# Altium PCB ife19_Elec_TS_TSAL_Light.PcbDoc
Units mil, origin at the board's own origin, x right, y up, seen from the top; angles counter-clockwise.
Board outline 1385.15 x 1390 mil, 2 copper layers (Top Layer, Bottom Layer); 25 components, 21 nets, 49 pads, 5 vias.
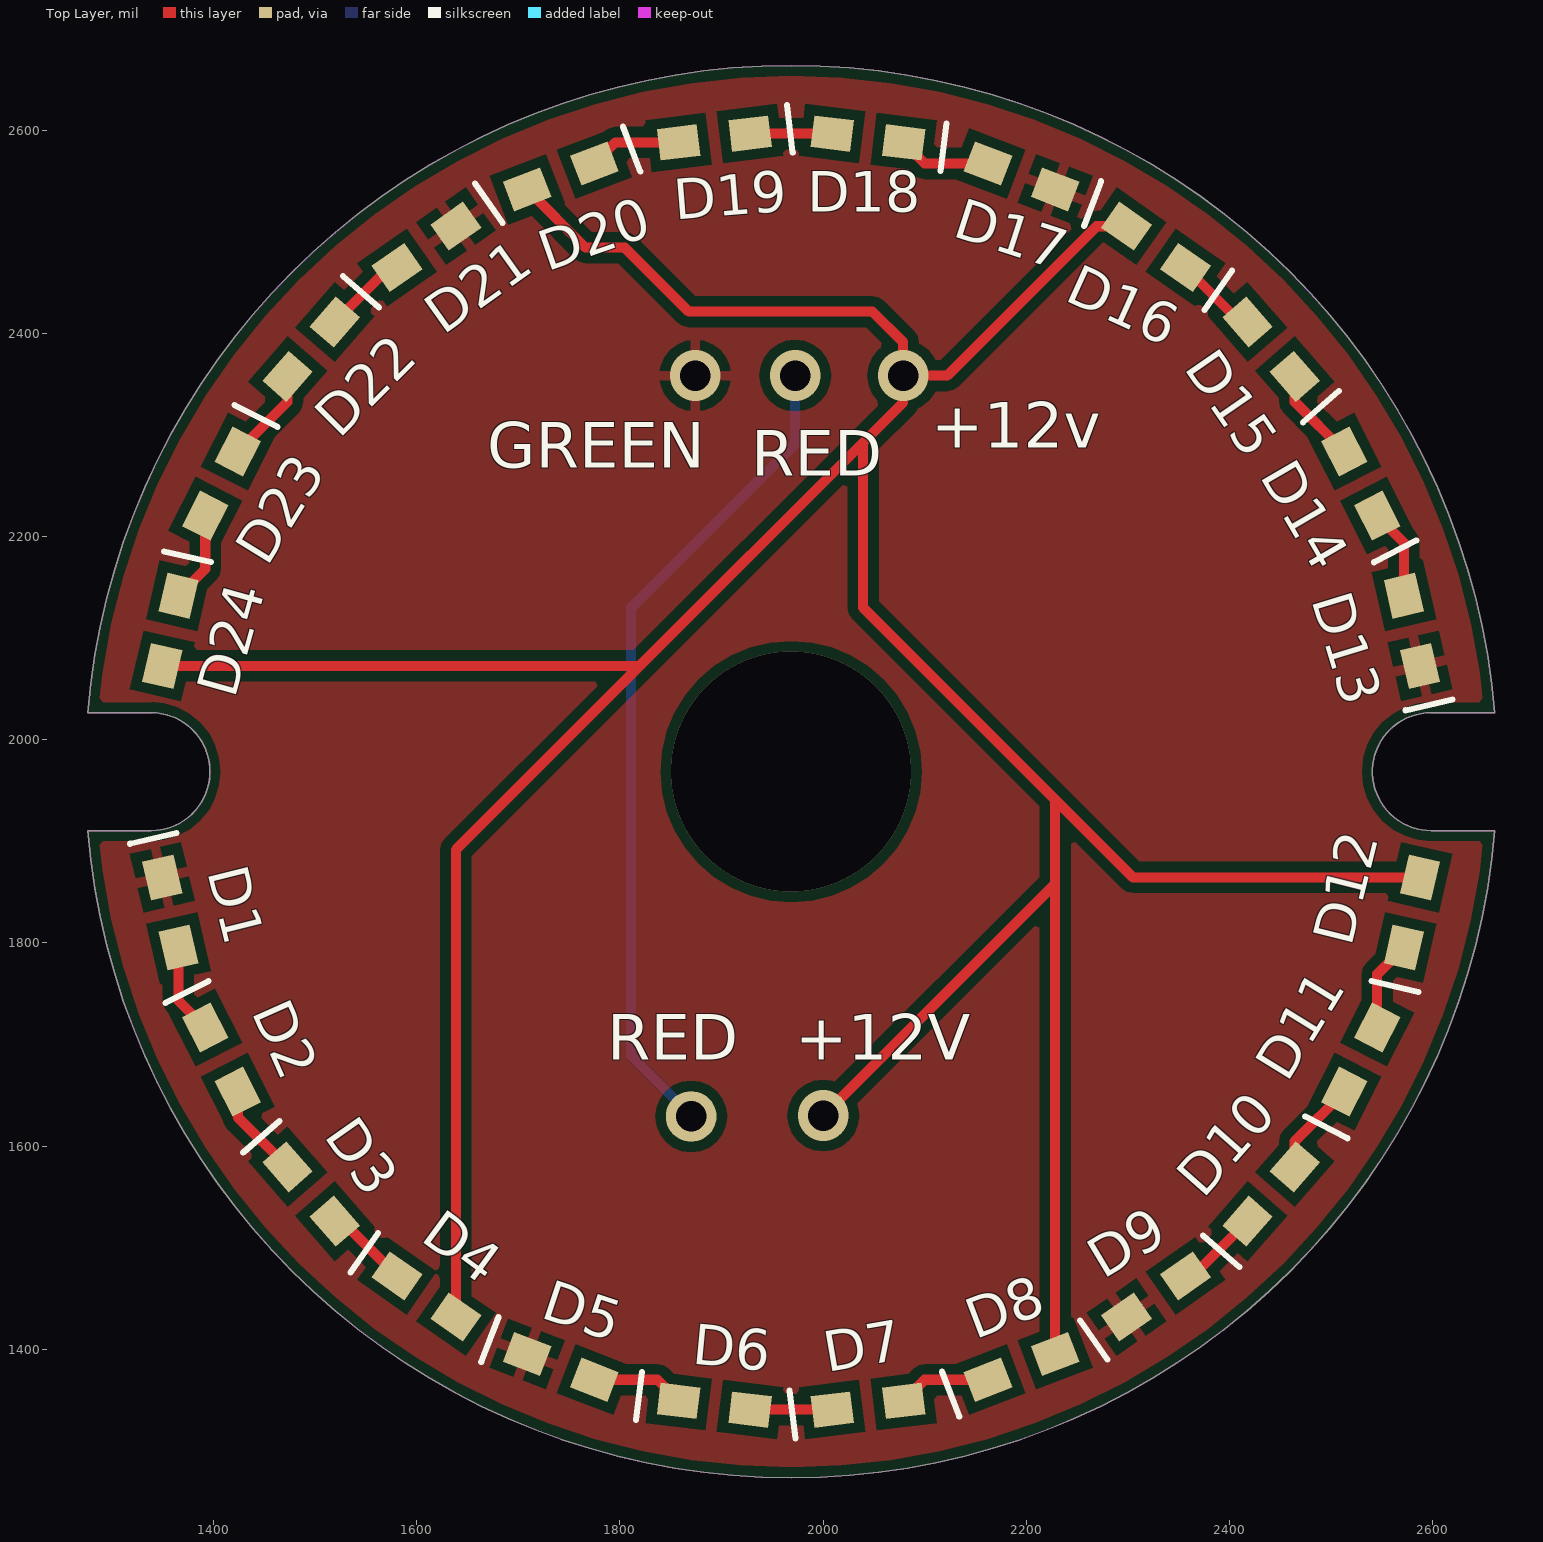
[diagram p0: Top Layer view]
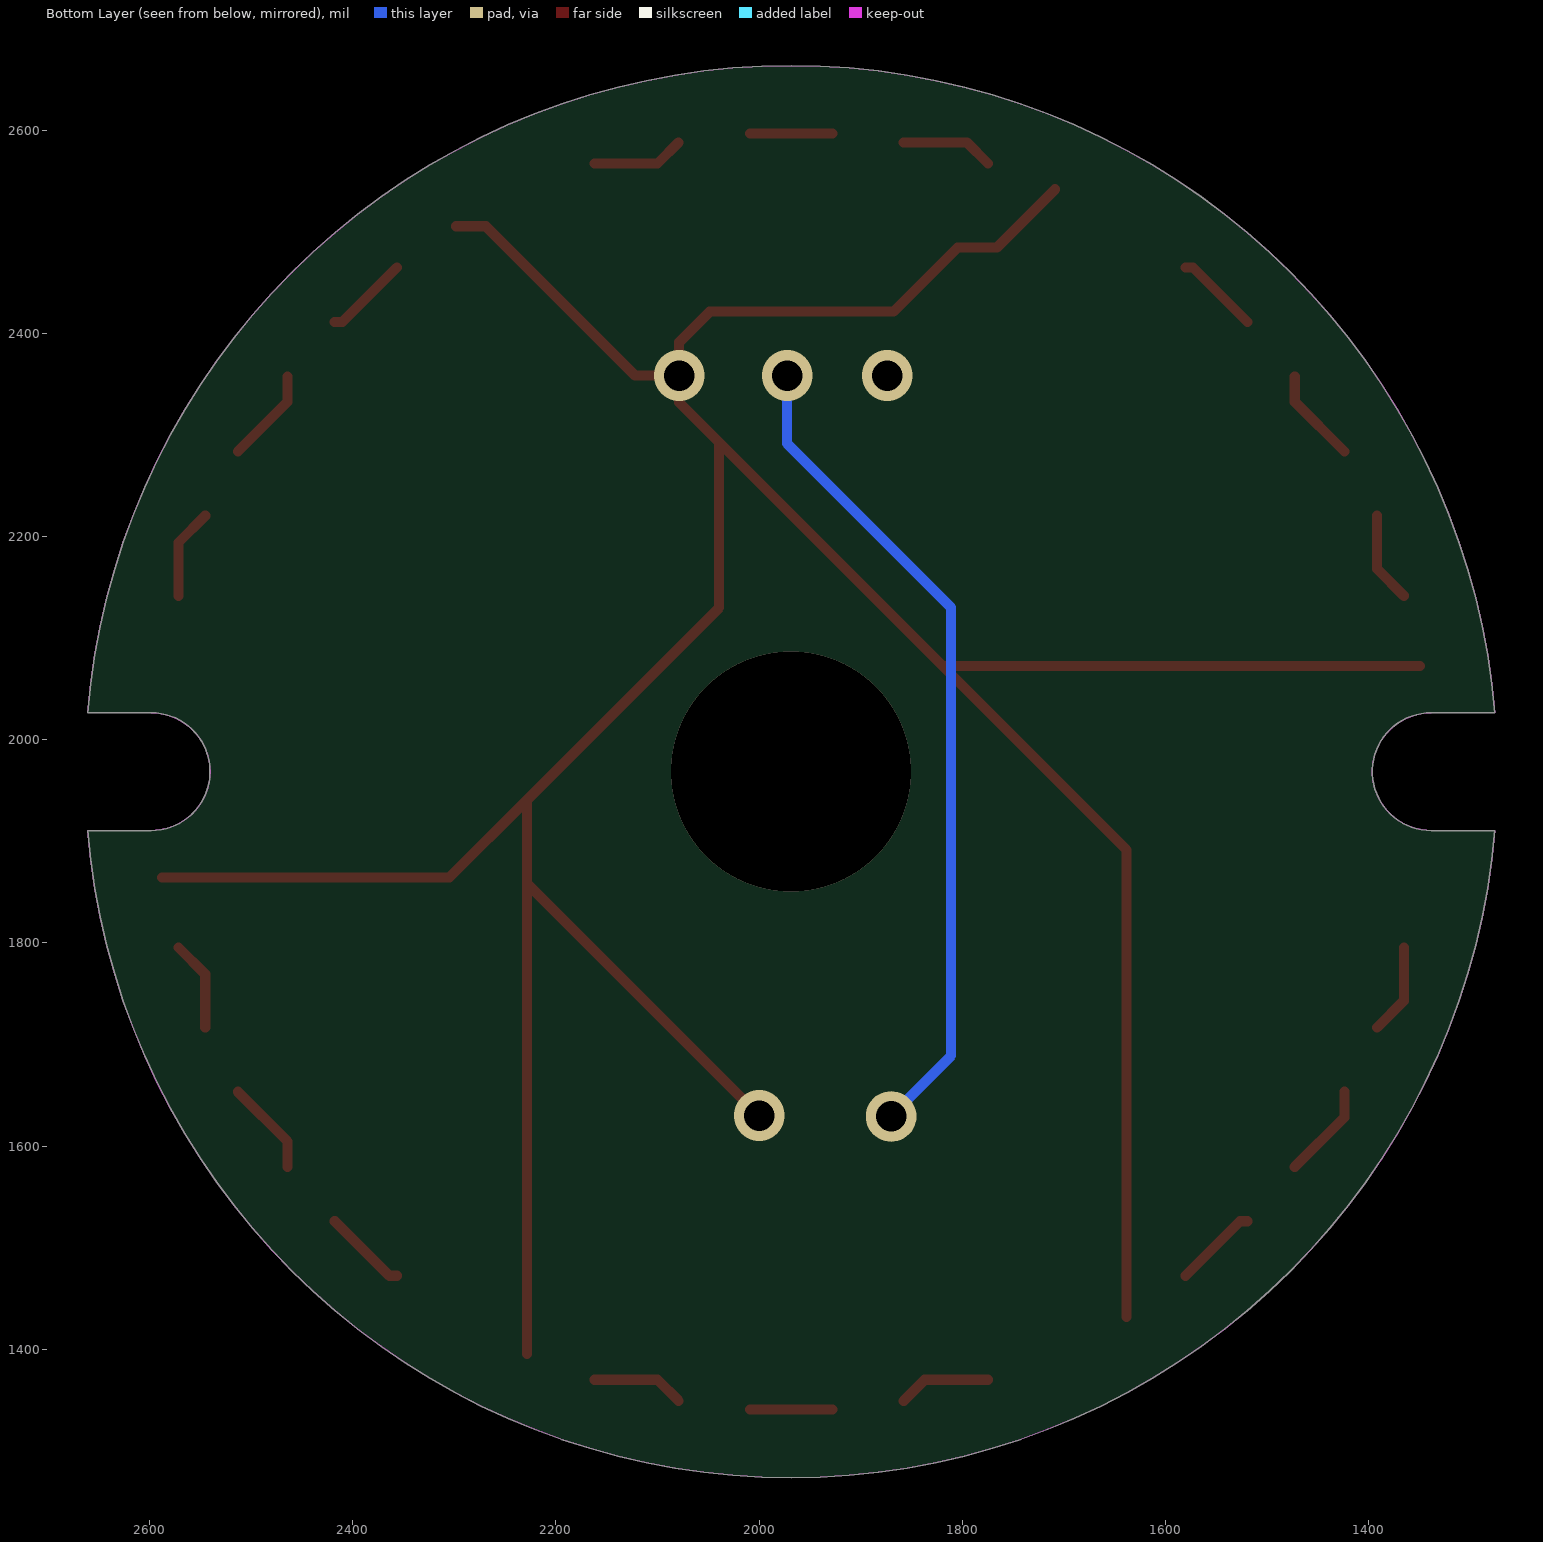
[diagram p1: Bottom Layer view, seen from below]
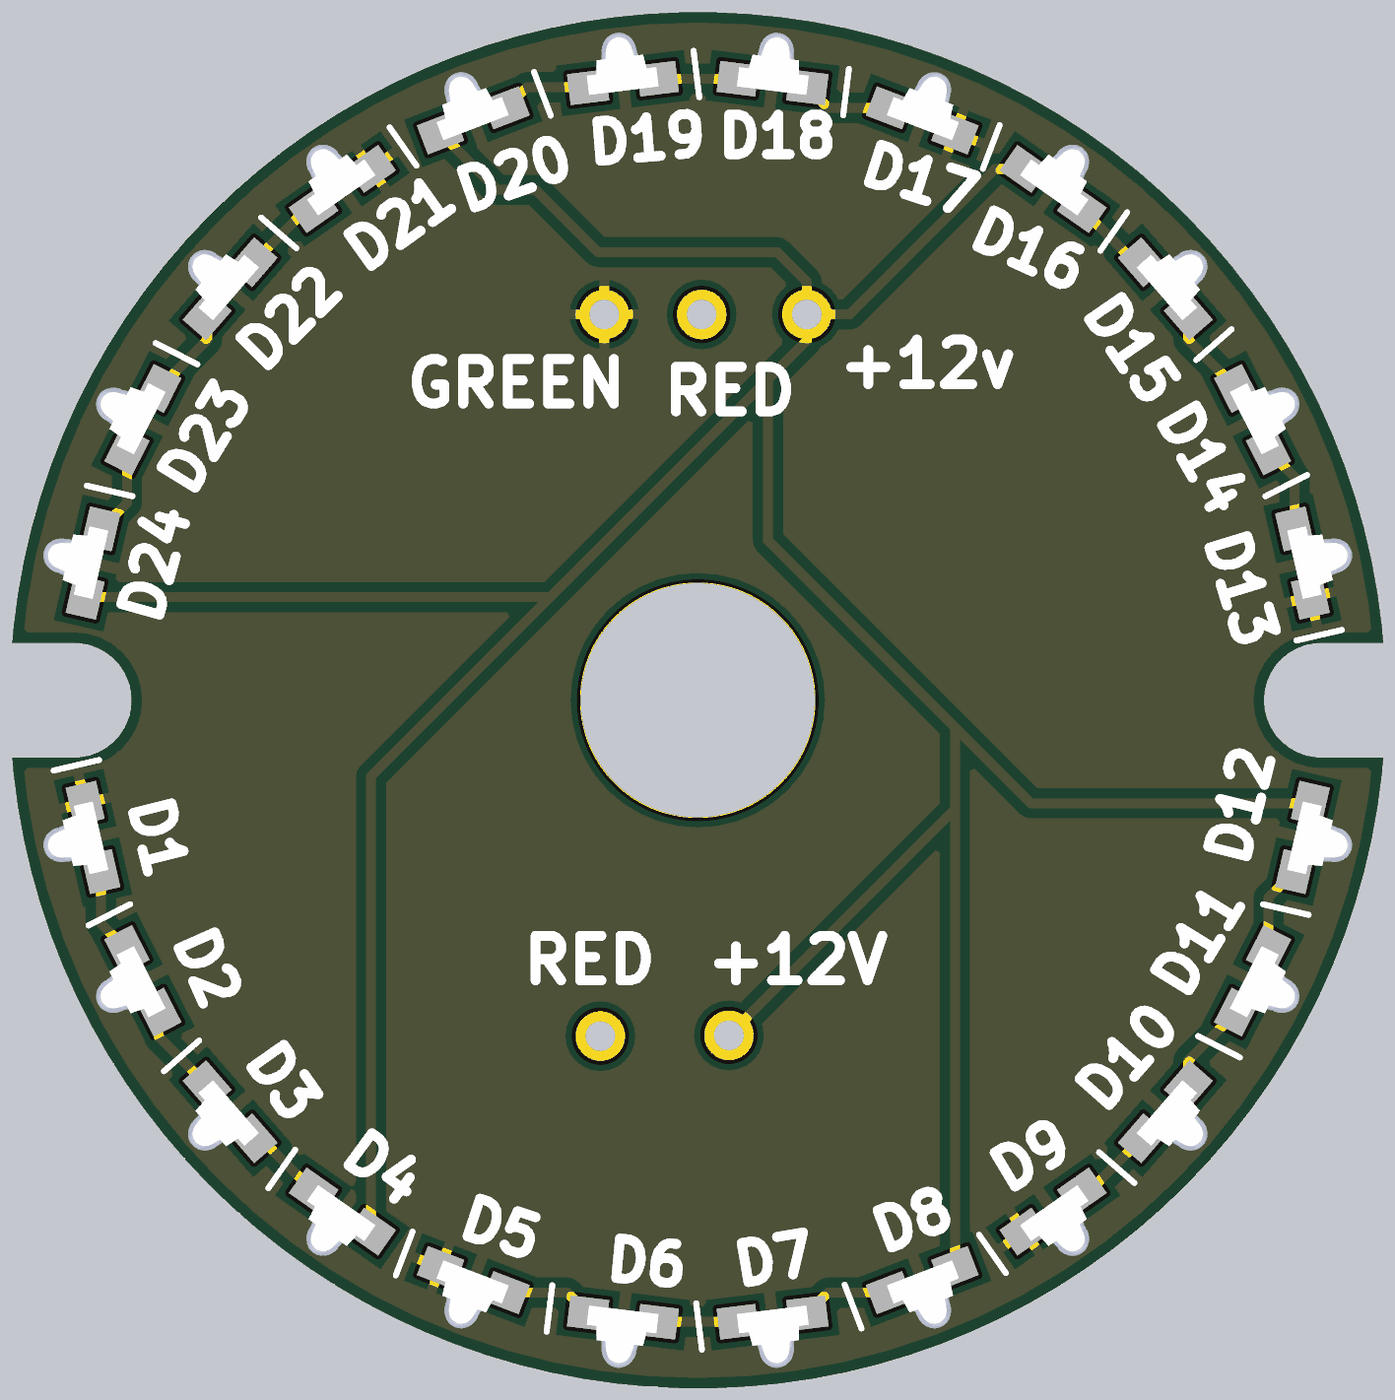
[diagram p2: 3D render of the assembled board from above, using the file's embedded part models]

## Layer stack, top to bottom
Top Solder: solder mask 0.4, Solder Resist, Dk 3.5
Top Layer: signal copper 1.4
Dielectric 1: dielectric 12.6, FR-4, Dk 4.8
Bottom Layer: signal copper 1.4
Bottom Solder: solder mask 0.4, Solder Resist, Dk 3.5

## Board outline
1275.93,1910.5 1338.5,1910.5 ccw(c1338.5,1968.5) 1338.5,2026.5 1275.93,2026.5 cw(c1968.5,1968.5) 2661.08,2026.5 2598.5,2026.5 ccw(c2598.5,1968.5) 2598.5,1910.5 2661.08,1910.5 cw(c1968.5,1968.5)

## Design rules (kind name [scope] priority, off if disabled: settings)
Clearance [All] p1: gap=10 ignorepadtopadclearanceinfootprint=FALSE except(0: Arc-Hole Track-Hole SMDPad-Hole THPad-Hole Via-Hole Fill-Hole Poly-Hole Region-Hole Text-Hole)
PolygonConnect [All] p1: connectstyle=Relief reliefconductorwidth=10 reliefentries=4 polygonreliefangle="90 Angle" airgapwidth=10
RoutingVias [All] p1: holewidth=28 width=50 viastyle="Through Hole" minholewidth=28 minwidth=50 maxholewidth=28 maxwidth=50
SolderMaskExpansion [All] p1: expansion=4
Width [All] p1: maxlimit=118.11 minlimit=6 preferedwidth=10
30 further rules are at their usual default settings.

## Components (designator, comment, footprint, x,y, rotation, side; value= is the part's Value field where it differs from the comment)
D1 "LEDGREEN-1806-RIGHT" LEDGREEN-1806-RIGHT 1357.48,1829.92 r283 top
D2 "LEDGREEN-1806-RIGHT" LEDGREEN-1806-RIGHT 1407.87,1685.04 r297 top
D3 "LEDGREEN-1806-RIGHT" LEDGREEN-1806-RIGHT 1496.06,1552.76 r311 top
D4 "LEDGREEN-1806-RIGHT" LEDGREEN-1806-RIGHT 1609.45,1451.97 r325 top
D5 "LEDGREEN-1806-RIGHT" LEDGREEN-1806-RIGHT 1741.73,1382.68 r339 top
D6 "LEDGREEN-1806-RIGHT" LEDGREEN-1806-RIGHT 1892.91,1344.88 r353 top
D7 "LEDGREEN-1806-RIGHT" LEDGREEN-1806-RIGHT 2044.09,1344.88 r7 top
D8 "LEDGREEN-1806-RIGHT" LEDGREEN-1806-RIGHT 2195.28,1382.68 r21 top
D9 "LEDGREEN-1806-RIGHT" LEDGREEN-1806-RIGHT 2327.56,1451.97 r35 top
D10 "LEDGREEN-1806-RIGHT" LEDGREEN-1806-RIGHT 2440.94,1552.76 r49 top
D11 "LEDGREEN-1806-RIGHT" LEDGREEN-1806-RIGHT 2529.13,1685.04 r63 top
D12 "LEDGREEN-1806-RIGHT" LEDGREEN-1806-RIGHT 2579.53,1829.92 r77 top
D13 "LEDGREEN-1806-RIGHT" LEDGREEN-1806-RIGHT 2579.53,2107.09 r103 top
D14 "LEDGREEN-1806-RIGHT" LEDGREEN-1806-RIGHT 2529.13,2251.97 r117 top
D15 "LEDGREEN-1806-RIGHT" LEDGREEN-1806-RIGHT 2440.94,2384.25 r131 top
D16 "LEDGREEN-1806-RIGHT" LEDGREEN-1806-RIGHT 2327.56,2485.04 r145 top
D17 "LEDGREEN-1806-RIGHT" LEDGREEN-1806-RIGHT 2195.28,2554.33 r159 top
D18 "LEDGREEN-1806-RIGHT" LEDGREEN-1806-RIGHT 2044.09,2592.13 r173 top
D19 "LEDGREEN-1806-RIGHT" LEDGREEN-1806-RIGHT 1892.91,2592.13 r187 top
D20 "LEDGREEN-1806-RIGHT" LEDGREEN-1806-RIGHT 1741.73,2554.33 r201 top
D21 "LEDGREEN-1806-RIGHT" LEDGREEN-1806-RIGHT 1609.45,2485.04 r215 top
D22 "LEDGREEN-1806-RIGHT" LEDGREEN-1806-RIGHT 1496.06,2384.25 r229 top
D23 "LEDGREEN-1806-RIGHT" LEDGREEN-1806-RIGHT 1407.87,2251.97 r243 top
D24 "LEDGREEN-1806-RIGHT" LEDGREEN-1806-RIGHT 1357.48,2107.09 r257 top
RED "TP*" Testpoint 1870.08,1629.11 r90 top locked (schematic designator TP*)

## Footprints (in the part's own frame and the unit in brackets; to place one, negate y for a bottom-side part, rotate by r counter-clockwise, add the part's x,y. Pads: shape width x height; smd on the part's side, far side on the other; paste and mask are expansions set on the pad)
LEDGREEN-1806-RIGHT [mm]
  rect 1x0.8 smd: A(0.9,0) K(-0.9,0)
  silkscreen extent -1.9,-0.6 -1.9,0.6, body extent -0.9,-1.3 0.9,0.2, height 0.63
Testpoint [mil]
  round 50 hole 30: 1(0,0)

## Part data
RED: library part Testpoint

## Via types
v1: diameter 50, hole 30, Top Layer to Bottom Layer, 4 vias
v2: diameter 236.22, hole 236.22, Top Layer to Bottom Layer, 1 vias

## Nets (pads, with @x,y where several pads share a name; then routed paths per layer and width w, separated by ;. In a path a pad name is that pad's centre, name@x,y a point inside that pad or via, vN(x,y) a via of type N, cw(c..) or ccw(c..) an arc to the next point about the centre after c; other vN are vias at no path point)
+12: D4.A D8.A D12.A D16.A D20.A D24.A | length 4014.1
  Top Layer w10: D24.A 1819.54,2072.56 ; D4.A 1638.47,1891.49 1819.54,2072.56 ; D20.A 1766.03,2484.25 1804.82,2484.25 1867.82,2421.26 2048.58,2421.26 2078.74,2391.1 v1(2078.74,2358.27) ; v1(2000,1629.92) 2228.36,1858.28 ; D8.A 2228.36,1858.28 ; D16.A 2269.14,2505.36 2122.05,2358.27 v1(2078.74,2358.27) ; D12.A 2304.85,1864.45 2228.36,1940.94 ; 1819.54,2072.56 2039.37,2292.39 ; 2039.37,2292.39 2039.37,2129.93 2228.36,1940.94 ; 2039.37,2292.39 2078.74,2331.76 v1(2078.74,2358.27) ; 2228.36,1858.28 2228.36,1940.94
GREEN: D1.K D5.K D9.K D13.K D17.K D21.K
  other v1: 1874.02,2358.27
NetD1_A: D1.A D2.K | length 89.7
  Top Layer w10: D1.A 1365.45,1742.95 D2.K
NetD2_A: D2.A D3.K | length 94.2
  Top Layer w10: D2.A 1423.96,1628.35 D3.K
NetD3_A: D3.A D4.K | length 83.4
  Top Layer w10: D3.A 1526.7,1526.01 D4.K
NetD5_A: D5.A D6.K | length 91.5
  Top Layer w10: D5.A 1836.97,1369.98 D6.K
NetD6_A: D6.A D7.K | length 80.8
  Top Layer w10: D6.A D7.K
NetD7_A: D7.A D8.K | length 91.5
  Top Layer w10: D7.A 2100.04,1369.98 D8.K
NetD9_A: D9.A D10.K | length 83.4
  Top Layer w10: D9.A 2363.98,1472.29 D10.K
NetD10_A: D10.A D11.K | length 94.2
  Top Layer w10: D10.A 2464.19,1604.61 D11.K
NetD11_A: D11.A D12.K | length 89.7
  Top Layer w10: D11.A 2545.22,1769.06 D12.K
NetD13_A: D13.A D14.K | length 89.7
  Top Layer w10: D14.K 2571.56,2194.06 D13.A
NetD14_A: D14.A D15.K | length 94.2
  Top Layer w10: D15.K 2464.19,2332.4 D14.A
NetD15_A: D15.A D16.K | length 83.4
  Top Layer w10: D16.K 2410.31,2410.99 D15.A
NetD17_A: D17.A D18.K | length 91.5
  Top Layer w10: D18.K 2100.04,2567.03 D17.A
NetD18_A: D18.A D19.K | length 80.8
  Top Layer w10: D19.K D18.A
NetD19_A: D19.A D20.K | length 91.5
  Top Layer w10: D20.K 1795.59,2587.81 D19.A
NetD21_A: D21.A D22.K | length 83.4
  Top Layer w10: D22.K 1573.03,2464.72 D21.A
NetD22_A: D22.A D23.K | length 94.2
  Top Layer w10: D23.K 1472.82,2332.4 D22.A
NetD23_A: D23.A D24.K | length 89.7
  Top Layer w10: D24.K 1391.79,2167.95 D23.A
RED: RED.1 | length 819.7
  Bottom Layer w10: RED.1@1870.08,1629.92 1811.02,1688.98 1811.02,2129.92 1972.44,2291.34 v1(1972.44,2358.27)
copper on no net:
  other v2: 1968.5,1968.5

## Polygon pours and split planes (outlines as drawn)
GREEN on Top Layer (solid, remove dead copper, pour order 2): 2791.34,1220.47 2779.53,1232.28 2779.53,2696.85 1059.06,2696.85 1074.8,2681.1 1074.8,1220.47
no net on Top Layer (solid, pour order 0): 2763.78,1334.65

## Keep-outs
Keep-Out Layer:
  the board outline again, w0.5

## Silkscreen, mask and mechanical layers (free items; w line width, h text height)
Top Overlay:
  text "+12v" at 2106.3,2287.4 h45
  text "GREEN" at 1669.29,2267.72 h45
  text "RED" at 1929.13,2259.84 h45
  text "+12V" at 1972.73,1685.04 h45